# Altium PCB PCB.PcbDoc
Units mm, origin at the board's own origin, x right, y up, seen from the top; angles counter-clockwise.
Board outline 149.06 x 97.41 mm, 2 copper layers (Top Layer, Bottom Layer); 121 components, 100 nets, 410 pads, 67 vias.
Unrouted connection lines stored in the file: 3.
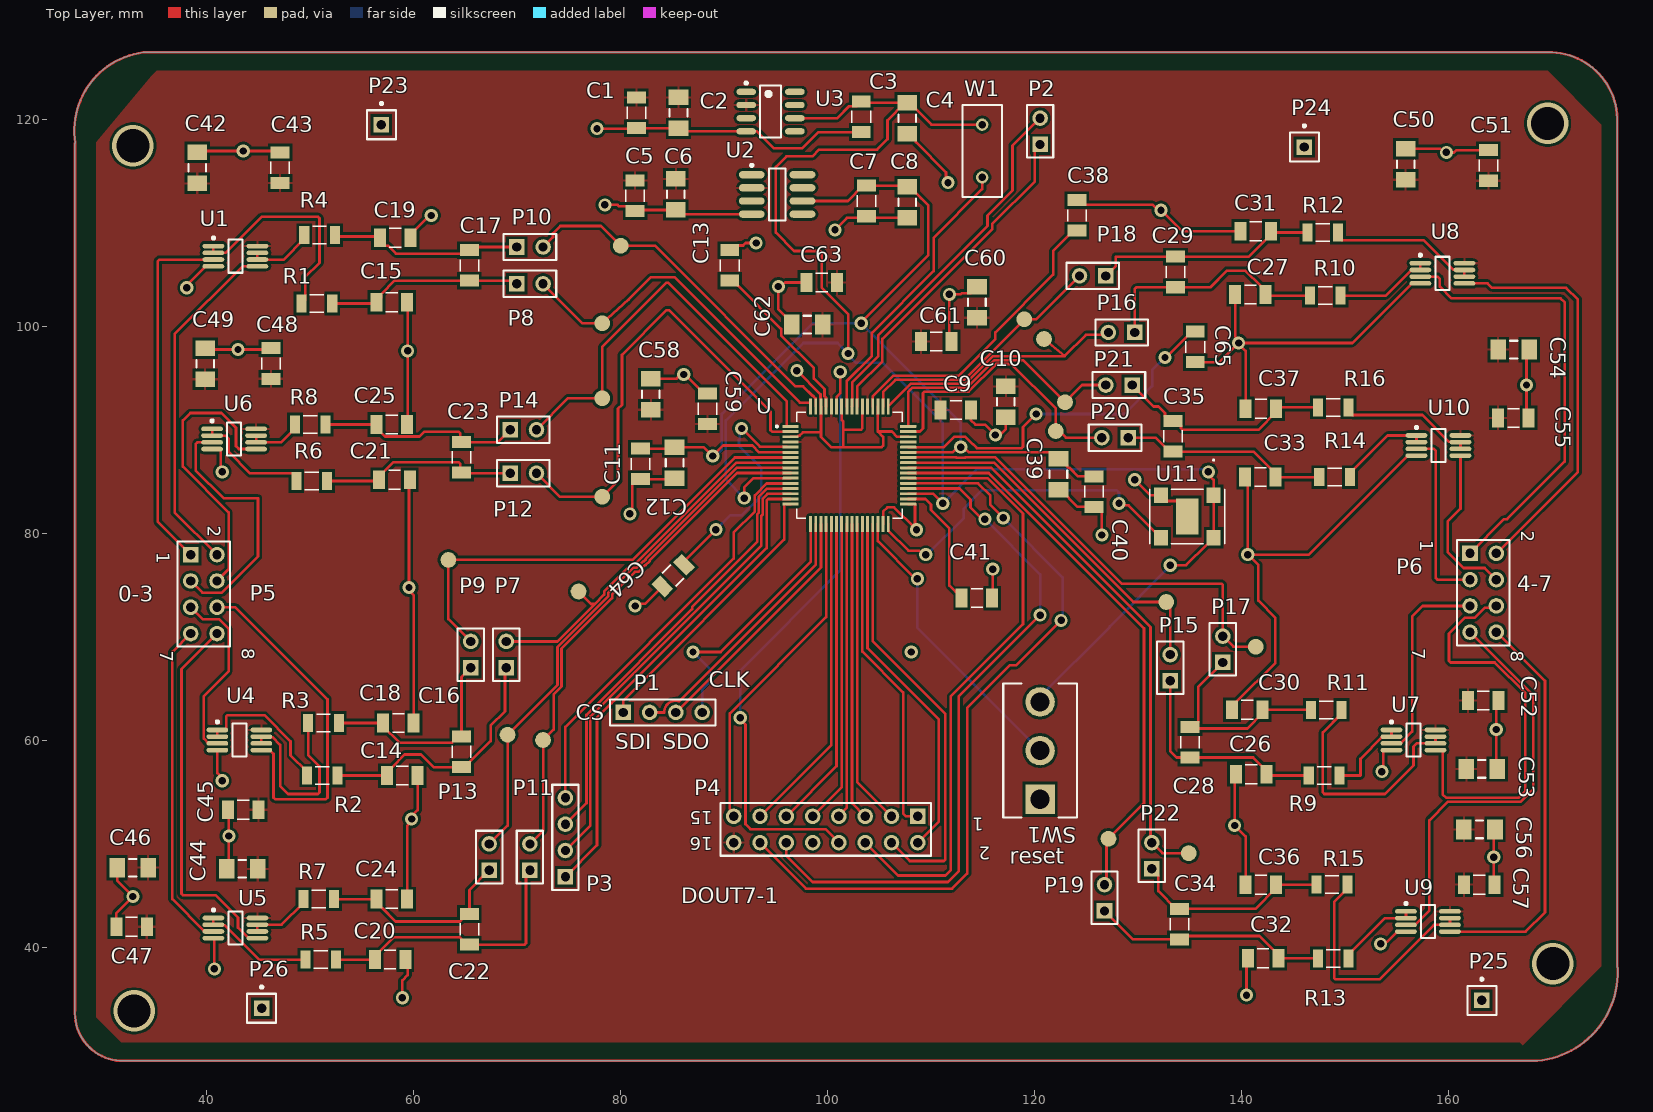
[diagram p0: Top Layer view]
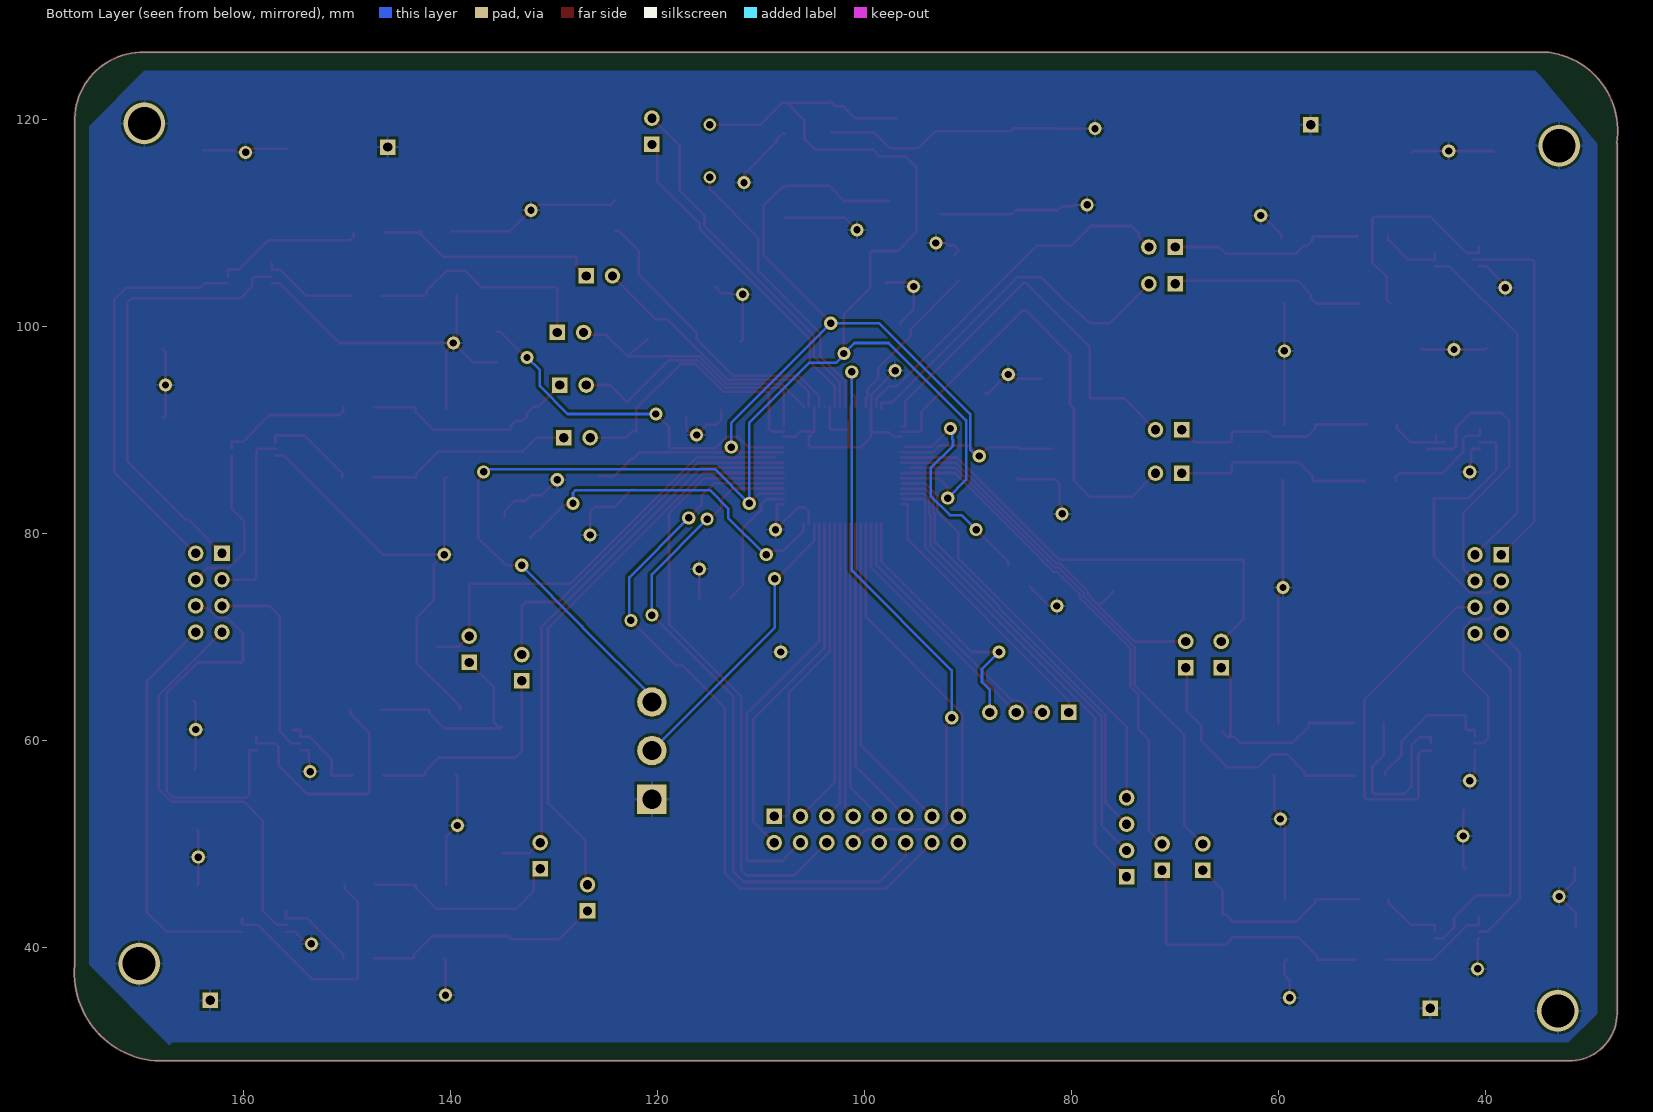
[diagram p1: Bottom Layer view, seen from below]
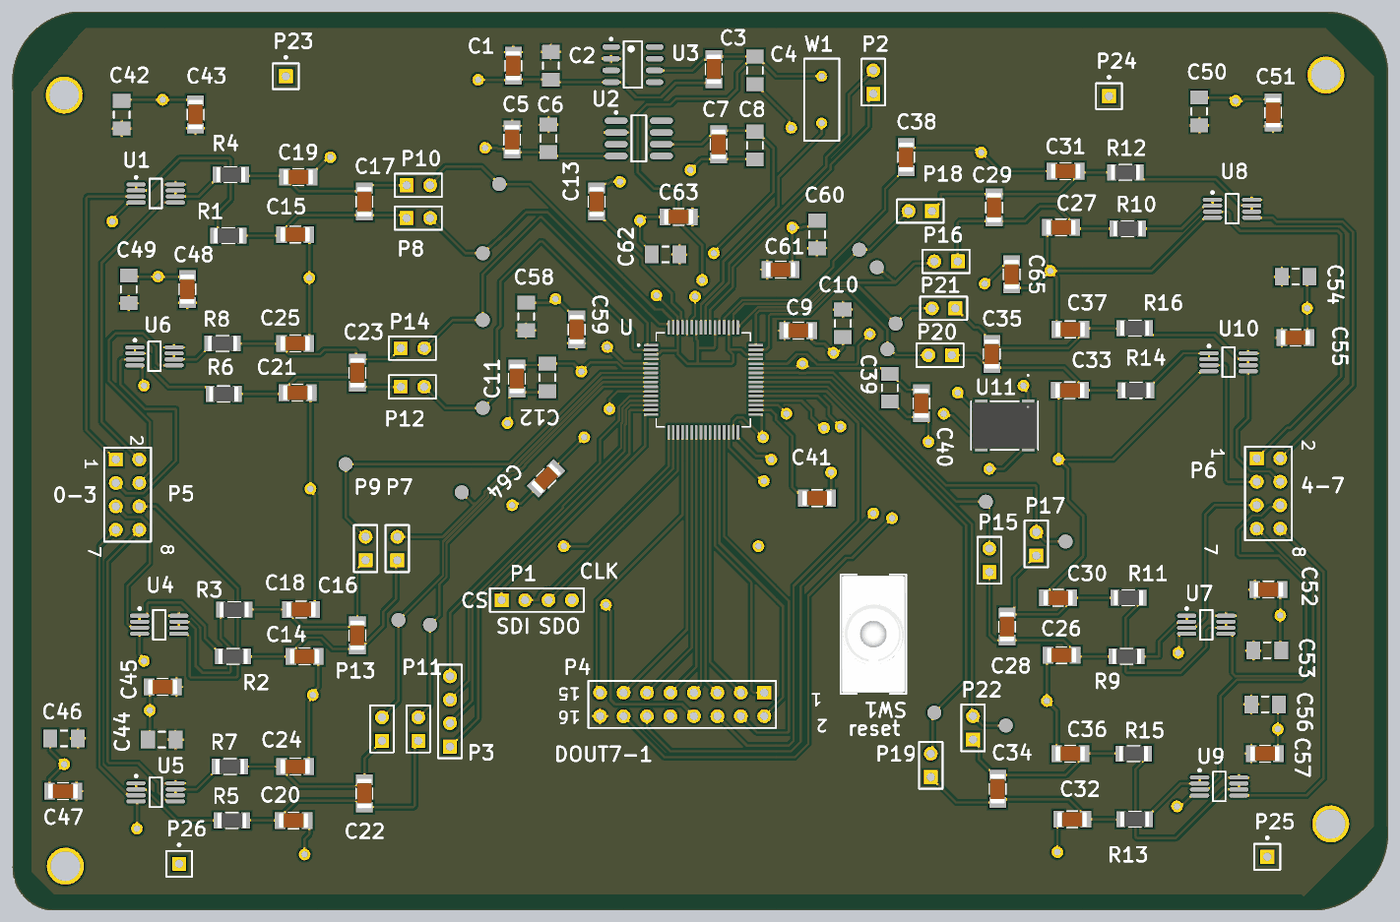
[diagram p2: 3D render of the assembled board from above, using the file's embedded part models]

## Layer stack, top to bottom
Top Solder: solder mask 0.0102, Solder Resist, Dk 3.5
Top Layer: signal copper 0.0356
Dielectric 1: dielectric 0.32, FR-4, Dk 4.8
Bottom Layer: signal copper 0.0356
Bottom Solder: solder mask 0.0102, Solder Resist, Dk 3.5

## Board outline
31.623,29.083 cw(c31.941,33.718) 27.305,34.036 27.305,117.729 27.34,117.735 cw(c34.861,118.935) 33.909,126.492 169.545,126.492 cw(c169.736,119.952) 176.276,120.142 176.276,38.354 cw(c167.767,37.592) 168.529,29.083

## Design rules (kind name [scope] priority, off if disabled: settings)
Clearance [All] p1: gap=0.254 ignorepadtopadclearanceinfootprint=TRUE except(0: Arc-Hole Track-Hole SMDPad-Hole THPad-Hole Via-Hole Fill-Hole Poly-Hole Region-Hole Text-Hole; 0.127: Arc-Arc Arc-Track Arc-SMDPad Track-Track Track-SMDPad SMDPad-SMDPad)
MinimumSolderMaskSliver [All] p1: minsoldermaskwidth=0.064
PolygonConnect [All] p1: connectstyle=Relief reliefconductorwidth=0.254 reliefentries=4 polygonreliefangle="90 Angle" airgapwidth=0.254
RoutingVias [All] p1: holewidth=0.711 width=1.27 viastyle="Through Hole" minholewidth=0.711 minwidth=1.27 maxholewidth=0.711 maxwidth=1.27
SilkToSolderMaskClearance [IsPad] p1: minsilkscreentomaskgap=0.127 clearancetoexposedcopper=TRUE
SolderMaskExpansion [All] p1: expansion=0.102 istentingtop=FALSE
Width [All] p1: maxlimit=0.254 minlimit=0.254 preferedwidth=0.254
28 further rules are at their usual default settings.

## Classes and differential pairs
component class Vref: C1 C2 C3 C4 C5 C6 C7 C8 U2 U3
component class driver4-8: C26 C27 C28 C29 C30 C31 C32 C33 C34 C35 C36 C37 C50 C51 C52 C53 C54 C55 C56 C57 P15 P16 P17 P18 P19 P20 P21 P22 R9 R10 R11 R12 R13 R14 R15 R16 U7 U8 U9 U10
component class driver0-3: C14 C15 C16 C17 C18 C19 C20 C21 C22 C23 C24 C25 C42 C43 C44 C45 C46 C47 C48 C49 P7 P8 P9 P10 P11 P12 P13 P14 R1 R2 R3 R4 R5 R6 R7 R8 U1 U4 U5 U6
component class ad7768: C9 C10 C11 C12 C13 C38 C39 C40 C41 C58 C59 C60 C61 C62 C63 C64 C65 P1 P2 P3 P4 P5 P6 P23 P24 P25 P26 SW1 U U11 W1

## Components (designator, comment, footprint, x,y, rotation, side; value= is the part's Value field where it differs from the comment)
C1 "1u" CAPC3216X127N 81.534,120.65 r90 top
C2 "12065C104KAT2A" CAPC3216X94X50ML20T25 85.598,120.65 r270 top
C3 "1u" CAPC3216X127N 103.251,120.269 r90 top
C4 "12065C104KAT2A" CAPC3216X94X50ML20T25 107.696,120.142 r270 top
C5 "1u" CAPC3216X127N 81.407,112.649 r90 top
C6 "12065C104KAT2A" CAPC3216X94X50ML20T25 85.344,112.776 r270 top
C7 "1u" CAPC3216X127N 103.759,112.141 r90 top
C8 "12065C104KAT2A" CAPC3216X94X50ML20T25 107.696,112.014 r270 top
C9 "1u" CAPC3216X127N 112.395,91.948 r180 top
C10 "12065C104KAT2A" CAPC3216X94X50ML20T25 117.221,92.734 r270 top
C11 "1u" CAPC3216X127N 81.915,86.741 r90 top
C12 "12065C104KAT2A" CAPC3216X94X50ML20T25 85.217,86.868 r270 top
C13 "1u" CAPC3216X127N 90.551,105.918 r90 top
C14 "120p" CAPC3216X94N 58.928,56.642 r180 top
C15 "120p" CAPC3216X94N 57.912,102.362 r180 top
C16 "330p" CAPC3216X94N 64.643,58.928 r270 top
C17 "330p" CAPC3216X94N 65.405,105.918 r270 top
C18 "120p" CAPC3216X94N 58.547,61.722 r0 top
C19 "120p" CAPC3216X94N 58.244,108.585 r0 top
C20 "120p" CAPC3216X94N 57.736,38.862 r180 top
C21 "120p" CAPC3216X94N 58.166,85.217 r180 top
C22 "330p" CAPC3216X94N 65.405,41.783 r270 top
C23 "330p" CAPC3216X94N 64.643,87.376 r270 top
C24 "120p" CAPC3216X94N 57.912,44.704 r0 top
C25 "120p" CAPC3216X94N 57.912,90.551 r0 top
C26 "120p" CAPC3216X94N 140.921,56.769 r0 top
C27 "120p" CAPC3216X94N 140.843,103.124 r0 top
C28 "330p" CAPC3216X94N 135.001,59.866 r270 top
C29 "330p" CAPC3216X94N 133.604,105.283 r270 top
C30 "120p" CAPC3216X94N 140.54,62.992 r180 top
C31 "120p" CAPC3216X94N 141.351,109.22 r180 top
C32 "120p" CAPC3216X94N 142.064,38.989 r0 top
C33 "120p" CAPC3216X94N 141.81,85.471 r0 top
C34 "330p" CAPC3216X94N 133.985,42.291 r270 top
C35 "330p" CAPC3216X94N 133.35,89.408 r270 top
C36 "120p" CAPC3216X94N 141.859,46.101 r180 top
C37 "120p" CAPC3216X94N 141.859,92.075 r180 top
C38 "1u" CAPC3216X127N 124.079,110.744 r90 top
C39 "1u" CAPC3216X127N 125.73,84.074 r90 top
C40 "12065C104KAT2A" CAPC3216X94X50ML20T25 122.301,85.749 r270 top
C41 "10uF" CAPC3216X178N 114.427,73.787 r0 top
C42 "0.1u" CAPC3216X94X50ML20T25 39.116,115.34 r90 top
C43 "1u" CAPC3216X127N 47.117,115.365 r90 top
C44 "0.1u" CAPC3216X94X50ML20T25 43.458,47.625 r180 top
C45 "1u" CAPC3216X127N 43.561,53.34 r180 top
C46 "0.1u" CAPC3216X94X50ML20T25 32.869,47.752 r180 top
C47 "1u" CAPC3216X127N 32.766,42.037 r180 top
C48 "1u" CAPC3216X127N 46.228,96.442 r90 top
C49 "0.1u" CAPC3216X94X50ML20T25 39.878,96.417 r90 top
C50 "0.1u" CAPC3216X94X50ML20T25 155.829,115.697 r90 top
C51 "1u" CAPC3216X127N 163.83,115.57 r90 top
C52 "1u" CAPC3216X127N 163.322,63.881 r0 top
C53 "0.1u" CAPC3216X94X50ML20T25 163.195,57.277 r0 top
C54 "0.1u" CAPC3216X94X50ML20T25 166.267,97.79 r0 top
C55 "1u" CAPC3216X127N 166.243,91.186 r0 top
C56 "0.1u" CAPC3216X94X50ML20T25 162.965,51.435 r0 top
C57 "1u" CAPC3216X127N 162.941,46.101 r0 top
C58 "12065C104KAT2A" CAPC3216X94X50ML20T25 82.931,93.472 r90 top
C59 "1u" CAPC3216X127N 88.392,92.075 r270 top
C60 "12065C104KAT2A" CAPC3216X94X50ML20T25 114.427,102.362 r90 top
C61 "1u" CAPC3216X127N 110.49,98.552 r180 top
C62 "12065C104KAT2A" CAPC3216X94X50ML20T25 98.02,100.203 r180 top
C63 "1u" CAPC3216X127N 99.441,104.267 r0 top
C64 "1u" CAPC3216X127N 85.09,75.946 r225 top
C65 "1u" CAPC3216X127N 135.509,98.044 r270 top
P1 "Header 4" HDR1X4 80.264,62.738 r0 top
P2 "Header 2" HDR1X2 120.523,117.602 r90 top
P3 "Header 4" HDR1X4 74.676,46.863 r90 top
P4 "Header 8X2" HDR2X8 108.712,52.705 r180 top
P5 "Header 4X2" HDR2X4 38.481,77.978 r270 top
P6 "Header 4X2" HDR2X4 162.052,78.105 r270 top
P7 "Header 2" HDR1X2 68.961,67.056 r90 top
P8 "Header 2" HDR1X2 69.977,104.14 r0 top
P9 "Header 2" HDR1X2 65.532,67.056 r90 top
P10 "Header 2" HDR1X2 69.977,107.696 r0 top
P11 "Header 2" HDR1X2 71.247,47.498 r90 top
P12 "Header 2" HDR1X2 69.342,85.852 r0 top
P13 "Header 2" HDR1X2 67.31,47.498 r90 top
P14 "Header 2" HDR1X2 69.342,90.043 r0 top
P15 "Header 2" HDR1X2 133.096,65.786 r90 top
P16 "Header 2" HDR1X2 129.667,99.441 r180 top
P17 "Header 2" HDR1X2 138.176,67.564 r90 top
P18 "Header 2" HDR1X2 126.873,104.902 r180 top
P19 "Header 2" HDR1X2 126.746,43.561 r90 top
P20 "Header 2" HDR1X2 129.032,89.281 r180 top
P21 "Header 2" HDR1X2 129.413,94.361 r180 top
P22 "Header 2" HDR1X2 131.318,47.625 r90 top
P23 "Plug" PIN1 56.896,119.507 r0 top
P24 "Plug" PIN1 146.05,117.348 r0 top
P25 "Plug" PIN1 163.195,34.925 r0 top
P26 "Plug" PIN1 45.339,34.163 r0 top
R1 "33" RESC3116X75N 50.673,102.235 r0 top
R2 "33" RESC3116X75N 51.181,56.642 r0 top
R3 "33" RESC3116X75N 51.308,61.722 r0 top
R4 "33" RESC3116X75N 50.927,108.839 r0 top
R5 "33" RESC3116X75N 51.054,38.862 r0 top
R6 "33" RESC3116X75N 50.165,85.09 r0 top
R7 "33" RESC3116X75N 50.844,44.704 r0 top
R8 "33" RESC3116X75N 50.038,90.551 r0 top
R9 "33" RESC3116X75N 147.955,56.642 r180 top
R10 "33" RESC3116X75N 148.082,102.997 r180 top
R11 "33" RESC3116X75N 148.165,62.992 r180 top
R12 "33" RESC3116X75N 147.828,109.093 r180 top
R13 "33" RESC3116X75N 148.844,38.989 r180 top
R14 "33" RESC3116X75N 148.971,85.471 r180 top
R15 "33" RESC3116X75N 148.717,46.101 r180 top
R16 "33" RESC3116X75N 148.844,92.202 r180 top
SW1 "A101SYCB04" FP-A101SYCB04-MFG 120.523,59.055 r180 top
U "AD7768-4BSTZ" QFP50P1200X1200X160-64N 102.108,86.614 r0 top
U1 "ADA4841-2YRMZ-RL" ADI-RM-8_M 42.799,106.807 r0 top
U2 "ADR4540BRZ" ADI-R-8_M 95.123,112.776 r0 top
U3 "ADR4533BRZ" ADI-R-8_L 94.488,120.777 r0 top
U4 "ADA4841-2YRMZ-RL" ADI-RM-8_M 43.18,60.071 r0 top
U5 "ADA4841-2YRMZ-RL" ADI-RM-8_M 42.799,41.91 r0 top
U6 "ADA4841-2YRMZ-RL" ADI-RM-8_M 42.672,89.154 r0 top
U7 "ADA4841-2YRMZ-RL" ADI-RM-8_M 156.591,60.071 r0 top
U8 "ADA4841-2YRMZ-RL" ADI-RM-8_M 159.385,105.156 r0 top
U9 "ADA4841-2YRMZ-RL" ADI-RM-8_M 157.988,42.545 r0 top
U10 "ADA4841-2YRMZ-RL" ADI-RM-8_M 159.004,88.519 r0 top
U11 "DSC1001AI2-032.7680" DFN4_7X5_MCH 134.747,81.661 r270 top
W1 "J_SPI" RAD-0.2 114.935,116.967 r270 top

## Footprints (in the part's own frame and the unit in brackets; to place one, negate y for a bottom-side part, rotate by r counter-clockwise, add the part's x,y. Pads: shape width x height; smd on the part's side, far side on the other; paste and mask are expansions set on the pad)
ADI-R-8_L [mm] "SOIC, 8-Leads, Body 4.9x3.9mm, Pitch 1.27mm, IPC High Density"
  oval 1.9x0.6 smd: 1(-2.35,1.905) 2(-2.35,0.635) 3(-2.35,-0.635) 4(-2.35,-1.905) 5(2.35,-1.905) 6(2.35,-0.635) 7(2.35,0.635) 8(2.35,1.905)
  silkscreen extent -2.47,-2.5 1,2.88, body extent -2,-2.5 2,2.5, height 1.75
ADI-R-8_M [mm] "SOIC, 8-Leads, Body 4.9x3.9mm, Pitch 1.27mm, IPC Low Density"
  oval 2.5x0.7 smd: 1(-2.45,1.905) 2(-2.45,0.635) 3(-2.45,-0.635) 4(-2.45,-1.905) 5(2.45,-1.905) 6(2.45,-0.635) 7(2.45,0.635) 8(2.45,1.905)
  silkscreen extent -2.57,-2.5 0.8,2.93, body extent -2,-2.5 2,2.5, height 1.75
ADI-RM-8_M [mm] "SOP, 8-Leads, Body 3x3mm, Pitch 0.65mm, IPC Low Density"
  oval 2.1x0.45 smd: 1(-2.125,0.975) 2(-2.125,0.325) 3(-2.125,-0.325) 4(-2.125,-0.975) 5(2.125,-0.975) 6(2.125,-0.325) 7(2.125,0.325) 8(2.125,0.975)
  silkscreen extent -2.25,-1.6 0.67,1.87, body extent -1.6,-1.6 1.6,1.6, height 1.1
CAPC3216X94N [mm]
  rect 1.16x1.82 smd: 1(-1.475,0) 2(1.475,0)
  silkscreen extent -0.57,-0.9 0.57,0.9, body extent -1.6,-0.8 1.6,0.8, height 0.94
CAPC3216X94X50ML20T25 [mm] "Chip Capacitor, 2-Leads, Body 3.20x1.60mm, IPC Low Density"
  rect 1.5x1.9 smd: 1(-1.5,0) 2(1.5,0)
  silkscreen extent -0.35,-0.85 0.35,0.85, body extent -1.7,-0.9 1.7,0.9, height 0.94
CAPC3216X127N [mm]
  rect 1.16x1.82 smd: 1(-1.475,0) 2(1.475,0)
  silkscreen extent -0.57,-0.9 0.57,0.9, body extent -1.6,-0.8 1.6,0.8, height 1.27
CAPC3216X178N [mm]
  rect 1.16x1.82 smd: 1(-1.475,0) 2(1.475,0)
  silkscreen extent -0.57,-0.9 0.57,0.9, body extent -1.6,-0.8 1.6,0.8, height 1.78
DFN4_7X5_MCH [mm]
  rect 1.505x1.349 smd paste+0 mask+0: 1(-2.052,2.54) 2(-2.052,-2.54) 3(2.052,-2.54) 4(2.052,2.54)
  rect 3.5x2.2 smd paste+0 mask+0: 5(0,0)
  silkscreen extent -5.52,-3.63 2.63,3.63, body extent -2.5,-3.5 2.5,3.5, height 0.85
FP-A101SYCB04-MFG [mil]
  rect 112.37x112.37 hole 73 paste-39370.1 mask+0: 1(0,185)
  round 112.37 hole 73 paste-39370.1 mask+0: 2(0,0) 3(0,-185)
  silkscreen extent -140,-255 140,255, body extent -144,-259 144,259, height 10
HDR1X2 [mm] "Connector; Header; 2 Position"
  rect 1.5x1.5 hole 0.9: 1(0,0)
  round 1.5 hole 0.9: 2(2.54,0)
  silkscreen extent -1.27,-1.27 3.81,1.27
HDR1X4 [mm] "Connector; Header; 4 Position"
  rect 1.5x1.5 hole 0.9: 1(0,0)
  round 1.5 hole 0.9: 2(2.54,0) 3(5.08,0) 4(7.62,0)
  silkscreen extent -1.27,-1.27 8.89,1.27
HDR2X4 [mm] "Connector; Header; 4x2 Position"
  rect 1.5x1.5 hole 0.9: 1(0,0)
  round 1.5 hole 0.9: 2(0,2.54) 3(2.54,0) 4(2.54,2.54) 5(5.08,0) 6(5.08,2.54) 7(7.62,0) 8(7.62,2.54)
  silkscreen extent -1.27,-1.27 8.89,3.81
HDR2X8 [mm] "Connector; Header; 8x2 Position"
  rect 1.5x1.5 hole 0.9: 1(0,0)
  round 1.5 hole 0.9: 2(0,2.54) 3(2.54,0) 4(2.54,2.54) 5(5.08,0) 6(5.08,2.54) 7(7.62,0) 8(7.62,2.54) 9(10.16,0) 10(10.16,2.54) 11(12.7,0) 12(12.7,2.54) 13(15.24,0) 14(15.24,2.54) 15(17.78,0) 16(17.78,2.54)
  silkscreen extent -1.27,-1.27 19.05,3.81
PIN1 [mm] "Connector; Plug"
  rect 1.5x1.5 hole 0.9: 1(0,0)
  silkscreen extent -1.4,-1.4 1.4,2.17
QFP50P1200X1200X160-64N [mm]
  rrect25% 1.56x0.28 smd mask+0.051: 1(-5.68,3.75) 2(-5.68,3.25) 3(-5.68,2.75) 4(-5.68,2.25) 5(-5.68,1.75) 6(-5.68,1.25) 7(-5.68,0.75) 8(-5.68,0.25) 9(-5.68,-0.25) 10(-5.68,-0.75) 11(-5.68,-1.25) 12(-5.68,-1.75) 13(-5.68,-2.25) 14(-5.68,-2.75) 15(-5.68,-3.25) 16(-5.68,-3.75) 33(5.68,-3.75) 34(5.68,-3.25) 35(5.68,-2.75) 36(5.68,-2.25) 37(5.68,-1.75) 38(5.68,-1.25) 39(5.68,-0.75) 40(5.68,-0.25) 41(5.68,0.25) 42(5.68,0.75) 43(5.68,1.25) 44(5.68,1.75) 45(5.68,2.25) 46(5.68,2.75) 47(5.68,3.25) 48(5.68,3.75)
  rrect25% 0.28x1.56 smd mask+0.051: 17(-3.75,-5.68) 18(-3.25,-5.68) 19(-2.75,-5.68) 20(-2.25,-5.68) 21(-1.75,-5.68) 22(-1.25,-5.68) 23(-0.75,-5.68) 24(-0.25,-5.68) 25(0.25,-5.68) 26(0.75,-5.68) 27(1.25,-5.68) 28(1.75,-5.68) 29(2.25,-5.68) 30(2.75,-5.68) 31(3.25,-5.68) 32(3.75,-5.68) 49(3.75,5.68) 50(3.25,5.68) 51(2.75,5.68) 52(2.25,5.68) 53(1.75,5.68) 54(1.25,5.68) 55(0.75,5.68) 56(0.25,5.68) 57(-0.25,5.68) 58(-0.75,5.68) 59(-1.25,5.68) 60(-1.75,5.68) 61(-2.25,5.68) 62(-2.75,5.68) 63(-3.25,5.68) 64(-3.75,5.68)
  silkscreen extent -7.11,-5.1 5.1,5.1
RAD-0.2 [mm] "Radial Cap, Thru-Hole; 2 Leads; 0.2 in Pin Spacing"
  round 1.2 hole 0.7: 1(-2.54,0) 2(2.54,0)
  silkscreen extent -4.44,-1.91 4.44,1.91
RESC3116X75N [mm]
  rect 0.97x1.73 smd: 1(-1.48,0) 2(1.48,0)
  silkscreen extent -0.67,-0.85 0.67,0.85, body extent -1.55,-0.8 1.55,0.8, height 0.75

## Part data
C1 C3 C5 C7 C9 C11 C13 C38 C39 C43 C45 C47 C48 C51 C52 C55 C57 C59 C61 C63 C64 C65: library part 1206YC105KAT2A, "Cap Ceramic 1uF 16V X7R 10% SMD 1206 125ÂÂŽ T/R", Package=None, Availability=Unavailable, MF="{'manufacturer': u'AVX'}", MP=1206YC105KAT2A, Price=None
C2 C4 C6 C8 C10 C12 C40 C42 C44 C46 C49 C50 C53 C54 C56 C58 C60 C62: library part CMP-2000-05018-1, "Chip Capacitor, Ceramic, 100 nF, 10%, 50 V, 1206, RoHS, Tape and Reel", Capacitance=100nF, Case Size/Dimension=1206, Dielectric=X7R, Manufacturer=AVX, Rated Voltage=50V, Tolerance (%)=±10%, Datasheet URL=http://www.mouser.com/ds/2/40/cauto-360.pdf, Datasheet Version=Sep-14, Manufacturer URL=http://www.avx.com/
C14 C15 C18 C19 C20 C21 C24 C25 C26 C27 C30 C31 C32 C33 C36 C37: library part 12061A121JAT2A, "CERAMIC CAPACITOR 120PF 100V, C0G, 5%, 1206", Package=None, Availability=Unavailable, MF="{'manufacturer': u'AVX'}", MP=12061A121JAT2A, Price=None
C16 C17 C22 C23 C28 C29 C34 C35: library part 12065A331JAT2A, "Ceramic Multilayer Capacitor; Capacitor Type:General Purpose; Capacitance:330pF; Capacitance Tolerance:Â± 5%; Voltage Rating:50VDC; Capacitor Dielectric Type:Multilayer Ceramic; Package/Case:1206; Termination Type:SMD ;RoHS Compliant: Yes", Package=None, Availability=Unavailable, MF="{'manufacturer': u'AVX'}", MP=12065A331JAT2A, Price=None
C41: library part 1206ZC106KAT2A, "CAPACITOR, MLCC, X7R, 10UF, 10V, 1206", Package=None, Availability=Unavailable, MF="{'manufacturer': u'AVX'}", MP=1206ZC106KAT2A, Price=None
P1 P3: "Header, 4-Pin", LatestRevisionDate=17-Jul-2002, LatestRevisionNote="Re-released for DXP Platform.", Publisher="Altium Limited"
P2 P7 P8 P9 P10 P11 P12 P13 P14 P15 P16 P17 P18 P19 P20 P21 P22: "Header, 2-Pin", LatestRevisionDate=17-Jul-2002, LatestRevisionNote="Re-released for DXP Platform.", Publisher="Altium Limited"
P4: "Header, 8-Pin, Dual row", LatestRevisionDate=17-Jul-2002, LatestRevisionNote="Re-released for DXP Platform.", Publisher="Altium Limited"
P5 P6: "Header, 4-Pin, Dual row", LatestRevisionDate=17-Jul-2002, LatestRevisionNote="Re-released for DXP Platform.", Publisher="Altium Limited"
R1 R2 R3 R4 R5 R6 R7 R8 R9 R10 R11 R12 R13 R14 R15 R16: library part RTAN1206BKE33R0, Package=None, Availability=Unavailable, MF="{'manufacturer': u'Stackpole Electronics Inc'}", MP=RTAN1206BKE33R0, Price=None
SW1: library part CMP-03408-000017-1, "SWITCH TOGGLE SPDT 0.4VA 20V", Actuator Color=Chrome, Contact Current Rating=400mA, Contact Resistance=10mR, Flammability Rating="UL94 V-1", Insulation Resistance=30MR, Max Operating Temperature=85°C, Max Voltage Rating (AC)=20V, Min Operating Temperature=-30°C, Package Quantity=100, Power Rating=400mW, Actuator Length=10.41mm, Actuator Material=Phenolic, Actuator Type="Standard Round", Contact Material=Copper, Contact Plating=Gold, Depth=6.86mm, Electrical Life=6000Cycles, ELV=Compliant, Illumination Type=Non-Illuminated, Lead Free="Lead Free", Max Voltage Rating (DC)=20V, Mount=Panel, Number of Poles=1, Number of Positions=2, Orientation=Straight, Packaging=Bulk, Radiation Hardening=No, REACH SVHC="No SVHC", RoHS Compliant=Yes, Series="Gemini A", Switch Function=On-On, Termination="PC Pins", Throw Configuration=SPDT, Voltage Rating (AC)=20V, Voltage Rating (DC)=20V
U: "24 Bit Analog to Digital Converter 4 Input 4 Sigma-Delta 64-LQFP _10x10_", Package="LQFP -64 Analog Devices", Digi-Key_Part_Number=AD7768-4BSTZ-ND, Digi-Key_Purchase_URL=https://www.digikey.com/product-detail/en/analog-devices-inc/AD7768-4BSTZ/AD7768-4BSTZ-ND/6072260?utm_source=snapeda&utm_medium=aggregator&utm_campaign=symbol, MF="Analog Devices", MP=AD7768-4BSTZ, SnapEDA_Link=https://www.snapeda.com/parts/AD7768-4BSTZ/Analog%20Devices%20Inc./view-part/501603/?ref=snap
U1 U4 U5 U6 U7 U8 U9 U10: library part CMP-0384-01677-1, "Double Channel Low Wide Band Noise Operational Amplifier, 80 MHz BW, 13 V/us SR, Industrial, 8-pin SOP (RM-8), Reel", Amplifiers Per Package=2, Generic Part Number=ADA4841-2, Input Bias Current=3uA, Input Offset Voltage=40uV, Manufacturer="Analog Devices", Code_JEDEC=MO-187-AA, ComponentLink1Description="Manufacturer URL", ComponentLink1URL=http://www.analog.com/en/index.html, ComponentLink2Description=Datasheet, ComponentLink2URL=http://www.analog.com/static/imported-files/data_sheets/ADA4841-1_4841-2.pdf, ComponentLink3Description="Package Specification", ComponentLink3URL=http://www.analog.com/static/imported-files/packages/PKG_PDF/MSOP%28RM%29/RM_8.pdf, DatasheetVersion="Rev. E", Iq/Amp=1.5mA, Mounting Technology="Surface Mount", PackageDescription="8-Pin Mini Small Outline Package, Body 3 x 3 mm, Pitch 0.65 mm", PackageReference=RM-8, PartNumber=ADA4841-2YRMZ-RL, Slew Rate=13V/us, Small Signal Bandwidth=80MHz, V Span Max=12V, V Span Min=2.7V
U2: library part CMP-0784-00192-1, "Ultralow Noise, High Accuracy Voltage Reference, 4.096 V Output, 3 to 15 V Supply, Industrial, 8-pin SOIC (R-8), Tube", Manufacturer="Analog Devices", Operating Temp Range="-40 to 125 degC", Code_JEDEC=MS-012-AA, ComponentLink1Description="Manufacturer URL", ComponentLink1URL=http://www.analog.com/en/index.html, ComponentLink2Description=Datasheet, ComponentLink2URL=http://www.analog.com/static/imported-files/data_sheets/ADR4520_4525_4530_4533_4540_4550.pdf, ComponentLink3Description="Package Specification", ComponentLink3URL=http://www.analog.com/static/imported-files/packages/PKG_PDF/SOIC_Narrow%20(R)/R_8.pdf, ComponentLink4Description="URL Link1", ComponentLink4URL="Product URL:http://www.analog.com/en/special-linear-functions/voltage-references/adr4540/products/product.html", DatasheetVersion="Rev. 0", Max V Supply (V)=15, Min V Supply (V)=3, Mounting Technology="Surface Mount", PackageDescription="8-Pin Standard Small Outline Package, Body 4.9 x 3.9 mm, Pitch 1.27 mm", PackageReference=R-8, PackageVersion="060506-A, 06/2006", Packing=Tube, PartNumber=ADR4540BRZ, Ref Out TC (ppm/C)=2, Vout=4.096V
U3: library part CMP-0784-00188-1, "Ultralow Noise, High Accuracy Voltage Reference, 3.3 V Output, 3 to 15 V Supply, Industrial, 8-pin SOIC (R-8), Tube", Manufacturer="Analog Devices", Operating Temp Range="-40 to 125 degC", Code_JEDEC=MS-012-AA, ComponentLink1Description="Manufacturer URL", ComponentLink1URL=http://www.analog.com/en/index.html, ComponentLink2Description=Datasheet, ComponentLink2URL=http://www.analog.com/static/imported-files/data_sheets/ADR4520_4525_4530_4533_4540_4550.pdf, ComponentLink3Description="Package Specification", ComponentLink3URL=http://www.analog.com/static/imported-files/packages/PKG_PDF/SOIC_Narrow%20(R)/R_8.pdf, ComponentLink4Description="URL Link1", ComponentLink4URL="Product URL:http://www.analog.com/en/special-linear-functions/voltage-references/adr4533/products/product.html", DatasheetVersion="Rev. 0", Max V Supply (V)=15, Min V Supply (V)=3, Mounting Technology="Surface Mount", PackageDescription="8-Pin Standard Small Outline Package, Body 4.9 x 3.9 mm, Pitch 1.27 mm", PackageReference=R-8, PackageVersion="060506-A, 06/2006", Packing=Tube, PartNumber=ADR4533BRZ, Ref Out TC (ppm/C)=2, Vout=3.3V
U11: "No Description Available", Mfr_Name=Microchip, Copyright="Copyright (C) 2021 Ultra Librarian. All rights reserved.", Digi-Key_Part_Number_1=DSC1001AI2-032.7680-ND, Manufacturer_Part_Number=DSC1001AI2-032.7680, RefDes=RefDes, Type=DEV
W1: library part Jumper, "Jumper Wire", LatestRevisionDate=17-Jul-2002, LatestRevisionNote="Re-released for DXP Platform.", PackageDescription="Radial Cap, Thru-Hole; 2 Leads; 0.2 in Pin Spacing", PackageReference=RAD-0.2, Published=24-Mar-1999, Publisher="Altium Limited"
P23 P24 P25 P26: LatestRevisionDate=17-Jul-2002, LatestRevisionNote="Re-released for DXP Platform.", Publisher="Altium Limited"

## Free pads (board coordinates)
  round 1.524 smd: 4(80.01,107.823) 5(78.232,100.33) 6(78.232,93.091) 7(78.232,83.566) 8(63.373,77.47) 10(75.946,74.422) 11(69.088,60.579) 12(72.517,60.071) 13(118.999,100.711) 14(120.904,98.806) 15(122.936,92.71) 16(122.047,89.916) 17(141.351,69.088) 18(132.715,73.406) 19(134.874,49.149) 20(127.127,50.546)

## Via types
v1: diameter 1.27, hole 0.711, Top Layer to Bottom Layer, 63 vias
v2: diameter 4, hole 3.2, Top Layer to Bottom Layer, 4 vias

## Nets (pads, with @x,y where several pads share a name; then routed paths per layer and width w, separated by ;. In a path a pad name is that pad's centre, name@x,y a point inside that pad or via, vN(x,y) a via of type N, cw(c..) or ccw(c..) an arc to the next point about the centre after c; other vN are vias at no path point)
5V: C1.2 C2.1 C5.2 C6.1 C9.2 C10.1 C42.1 C43.1 C44.1 C45.1 C46.1 C47.1 C48.1 C49.1 C50.1 C51.1 C52.1 C53.1 C54.1 C55.1 C56.1 C57.1 C58.1 C59.2 C60.1 C61.2 C62.1 C63.2 P4.16 U1.8 U2.2 U3.2 U4.8 U5.8 U6.8 U7.8 U8.8 U9.8 U10.8 U.4 U.45 U.53 U.60 | length 0
  Top Layer w0.254: U.53 U.53@103.871,92.307
AIN0+: P8.2 pad.5 U.64 | length 34.7
  Top Layer w0.254: P8.2 76.327,100.33 pad.5 80.769,102.616 82.928,104.775 85.217,104.775 97.326,92.666 98.345,92.666 98.358,92.653 U.64@98.358,92.15
AIN0-: P10.2 pad.4 U.63 | length 35
  Top Layer w0.254: P10.2 73.473,108.652 73.473,109.011 74.19,109.728 78.105,109.728 pad.4 83.329,107.823 96.918,94.234 97.632,94.234 98.538,93.328 98.583,93.328 98.845,93.066 U.63@98.845,92.307
AIN1+: P12.2 pad.7 U.2 | length 45.8
  Top Layer w0.254: P12.2 74.168,83.566 pad.7 79.756,85.09 79.756,92.075 80.137,92.456 80.137,97.282 84.455,101.6 84.692,101.6 94.488,91.804 94.488,90.013 94.637,89.864 U.2
AIN1-: P14.2 pad.6 U.1 | length 40.5
  Top Layer w0.254: P14.2 74.93,93.091 pad.6 78.232,98.044 84.413,104.225 84.624,104.225 96.056,92.793 96.056,90.377 96.069,90.364 U.1
AIN2+: P7.2 pad.10 U.8 | length 36.9
  Top Layer w0.254: P7.2 73.909,69.596 77.531,73.218 ; pad.10 77.15,73.218 77.531,73.218 ; U.8 91.177,86.864 81.402,77.089 81.069,77.089 78.423,74.442 78.423,74.109 77.531,73.218
AIN2-: P9.2 pad.8 U.7 | length 45.9
  Top Layer w0.254: P9.2 63.373,71.755 pad.8 81.153,77.47 91.047,87.364 U.7
AIN3+: P11.2 pad.12 U.10 | length 49.5
  Top Layer w0.254: P11.2 72.517,51.308 pad.12 73.533,61.087 73.533,64.485 74.295,65.247 74.295,68.904 79.185,73.794 79.185,74.127 81.385,76.327 81.718,76.327 82.352,76.961 82.432,76.961 82.804,77.333 82.804,77.413 91.255,85.864 U.10
AIN3-: P13.2 pad.11 U.9 | length 50.9
  Top Layer w0.254: P13.2 69.088,51.816 pad.11 73.914,65.405 73.914,69.062 78.804,73.952 78.804,74.285 81.227,76.708 81.56,76.708 82.194,77.342 82.274,77.342 82.423,77.491 82.423,77.571 91.212,86.36 95.631,86.36
AIN4+: P16.2 pad.14 U.49 | length 26.7
  Top Layer w0.254: U.49 108.052,94.488 113.315,94.488 115.982,97.155 122.809,97.155 ; pad.14 122.901,97.155 124.951,99.204 126.89,99.204 P16.2
AIN4-: P18.2 pad.13 U.50 | length 25
  Top Layer w0.254: U.50 105.371,92.307 105.371,93.687 106.553,94.869 113.157,94.869 pad.13 120.142,100.711 P18.2
AIN5+: P20.2 pad.16 U.47 | length 27.6
  Top Layer w0.254: U.47 107.801,89.877 108.927,89.877 109.22,90.17 109.22,93.577 109.369,93.726 113.63,93.726 116.297,96.393 117.729,96.393 122.047,92.075 pad.16 122.391,89.916 123.026,89.281 P20.2
AIN5-: P21.2 pad.15 U.48 | length 26.1
  Top Layer w0.254: U.48 107.788,93.685 108.21,94.107 113.473,94.107 116.14,96.774 118.872,96.774 pad.15 124.587,94.361 P21.2
AIN6+: P15.2 pad.18 U.41 | length 35.7
  Top Layer w0.254: U.41 116.082,86.864 129.54,73.406 pad.18 133.096,73.025 P15.2
AIN6-: P17.2 pad.17 U.42 | length 43.3
  Top Layer w0.254: 108.585,87.376 112.414,87.376 112.439,87.351 113.28,87.351 113.305,87.376 116.205,87.376 128.397,75.184 138.027,75.184 138.176,75.035 P17.2 139.192,69.088 pad.17
AIN7+: P19.2 pad.20 U.39 | length 55.3
  Top Layer w0.254: U.39 115.558,85.864 130.556,70.866 130.556,53.975 pad.20 126.936,50.355 126.936,46.291 P19.2
AIN7-: P22.2 pad.19 U.40 | length 54.6
  Top Layer w0.254: U.40 115.82,86.364 131.191,70.993 131.191,50.292 P22.2 132.334,49.149 pad.19
DCLK: P4.2 U.28 | length 34.5
  Top Layer w0.254: U.28 103.858,68.95 110.744,62.064 110.744,52.197 P4.2
DOUT0: P4.1 U.27 | length 31.1
  Top Layer w0.254: U.27 103.358,68.604 107.303,64.66 107.303,52.983 107.581,52.705 P4.1
DOUT1: P4.3 U.26 | length 29.6
  Top Layer w0.254: U.26 102.858,56.019 P4.3
DOUT2: P4.5 U.25 | length 28.8
  Top Layer w0.254: U.25 102.358,53.979 P4.5
DOUT3: P4.7 U.24 | length 28.5
  Top Layer w0.254: P4.7 101.092,52.772 101.858,53.538 U.24
DOUT4: P4.9 U.23 | length 29.4
  Top Layer w0.254: P4.9 101.358,55.511 U.23
DOUT5: P4.11 U.22 | length 30.2
  Top Layer w0.254: P4.11 100.858,57.551 U.22
DOUT6: P4.13 U.21 | length 31.1
  Top Layer w0.254: P4.13 100.358,59.591 U.21
DOUT7: P4.15 U.20 | length 32.2
  Top Layer w0.254: P4.15 90.932,53.042 90.551,53.423 90.551,62.651 99.858,71.958 U.20
DRDY: P4.4 U.29 | length 41.3
  Top Layer w0.254: U.29 104.358,69.632 111.379,62.611 111.379,48.536 111.23,48.387 107.95,48.387 P4.4
GND: C1.1 C2.2 C3.1 C4.2 C5.1 C6.2 C7.1 C8.2 C9.1 C10.2 C11.1 C12.2 C13.2 C14.1 C15.1 C18.2 C19.2 C20.1 C21.1 C24.2 C25.2 C26.1 C27.1 C30.2 C31.2 C32.1 C33.1 C36.2 C37.2 C38.2 C39.1 C40.2 C41.2 C42.2 C43.2 C44.2 C45.2 C46.2 C47.2 C48.2 C49.2 C50.2 C51.2 C52.2 C53.2 C54.2 C55.2 C56.2 C57.2 C58.2 C59.1 C60.2 C61.1 C62.2 C63.1 C64.2 C65.2 P23.1 P24.1 P25.1 P26.1 SW1.1 U1.4 U2.4 U3.4 U4.4 U5.4 U6.4 U7.4 U8.4 U9.4 U10.4 U11.2 U11.5 U.3 U.31 U.33 U.46 U.51 U.54 U.58 U.62 | length 396.7
  Top Layer w0.254: C47.2 31.291,43.356 v1(32.893,44.958) 31.369,46.482 C46.2 ; v1(38.1,103.759) 38.1,104.03 39.902,105.832 U1.4 ; C42.2 39.243,116.967 v1(43.561,116.967) 46.99,116.967 C43.2 ; C49.2 40.005,97.79 v1(43.053,97.79) 46.101,97.79 C48.2 ; U6.4 41.296,88.179 41.387,88.088 41.387,86.121 v1(41.529,85.979) ; U5.4 40.676,40.935 40.767,40.844 v1(40.767,37.973) ; U4.4 41.055,56.883 41.529,56.409 v1(41.529,56.134) ; C44.2 42.164,47.831 v1(42.164,50.8) 42.164,53.262 C45.2 C45.2@42.037,53.291 ; v1(58.928,35.179) 58.928,36.852 59.436,37.36 59.436,38.637 C20.1 ; C24.2 59.387,51.746 59.817,52.176 v1(59.817,52.451) 59.817,52.716 60.403,53.302 C14.1 ; C25.2 59.436,90.6 v1(59.436,97.663) 59.436,102.313 C15.1 ; C21.1 59.563,85.139 v1(59.563,74.803) 59.563,74.528 60.022,74.069 C18.2 ; C19.2 59.719,108.915 61.548,110.744 v1(61.722,110.744) ; v1(77.724,119.126) 81.485,119.126 C1.1 81.559,119.15 C2.2 85.876,118.872 U3.4 93.169,118.872 94.82,117.221 97.536,117.221 99.109,118.794 C3.1 ; v1(78.486,111.76) 79.723,111.76 79.856,111.627 80.954,111.627 C5.1 81.509,111.276 C6.2 85.749,110.871 U2.4 ; v1(80.899,81.915) 80.899,82.19 81.132,82.423 81.132,84.813 81.585,85.266 C11.1 85.115,85.266 C12.2 ; v1(81.407,73.025) 81.601,73.219 82.363,73.219 C64.2 ; C58.2 85.426,94.972 85.831,95.377 v1(86.106,95.377) 86.235,95.377 88.062,93.55 C59.1 ; C13.2@91.311,106.94 90.858,107.393 91.311,107.846 91.844,107.846 92.075,108.077 v1(93.091,108.077) ; U.3 97.068,89.364 97.174,89.47 97.293,89.47 97.612,89.789 99.358,89.789 ; C62.2 96.52,100.403 95.25,101.673 v1(95.25,103.886) 95.525,103.886 95.906,104.267 C63.1 ; v1(97.028,95.758) 99.314,93.472 99.314,93.136 99.345,93.105 99.345,92.307 U.62 99.358,89.789 ; v1(100.711,109.347) 101.878,110.514 C8.2 ; U.58 101.371,92.281 101.371,90.967 101.514,90.824 101.514,90.043 ; U.54 103.358,90.195 103.206,90.043 101.514,90.043 ; U.51 104.858,89.872 ; U.31@105.371,80.921 105.371,82.13 105.791,82.55 106.426,82.55 v1@108.441,80.535 ; C4.2 107.896,118.642 108.519,118.019 108.519,117.819 111.439,114.899 111.439,114.113 v1(111.633,113.919) ; U.33 108.428,82.864 108.441,82.851 v1@108.441,80.535 ; U.46 106.724,89.364 106.216,89.872 104.858,89.872 ; v1(108.585,80.391) v1@108.441,80.535 ; C61.1 111.76,98.757 v1(111.76,103.124) 112.859,103.124 112.974,103.239 113.804,103.239 C60.2 ; C9.1 113.821,91.899 113.821,90.983 114.274,90.53 115.21,90.53 v1(116.205,89.535) 116.399,89.729 116.847,89.729 117.221,90.103 C10.2 ; C41.2 115.951,73.836 v1(115.951,76.581) ; C40.2 122.501,84.249 124.151,82.599 C39.1 126.039,82.599 126.492,82.146 v1(126.492,79.883) ; C38.2 124.532,111.766 131.418,111.766 131.932,111.252 v1(132.207,111.252) 134.239,109.22 C31.2 ; v1(129.667,85.217) 131.171,83.713 U11.2 132.755,83.166 133.774,83.166 134.747,82.193 U11.5 ; C65.2 137.844,96.569 v1(139.7,98.425) ; C30.2 139.065,63.322 139.518,63.775 143.256,67.513 143.256,71.882 141.605,73.533 141.605,76.962 v1(140.589,77.978) ; C27.1 139.368,99.032 139.7,98.7 v1(139.7,98.425) ; C26.1 139.319,56.642 v1(139.319,51.816) 140.384,50.751 C36.2 ; C33.1 140.589,85.217 v1(140.589,77.978) ; C37.2 140.384,97.672 139.7,98.356 v1(139.7,98.425) ; v1(140.462,35.433) 140.462,38.862 C32.1 ; v1(153.416,40.386) 153.61,40.58 154.048,40.58 155.038,41.57 U9.4 ; v1(153.543,57.023) 153.655,57.135 153.655,59.005 153.746,59.096 U7.4 ; C50.2 159.134,117.197 159.491,116.84 v1(159.766,116.84) 159.788,116.818 160.506,116.818 160.733,117.045 C51.2 ; U10.4 156.054,87.544 146.488,77.978 v1(140.589,77.978) ; U8.4 156.435,104.181 150.679,98.425 v1(139.7,98.425) ; C57.2 164.338,46.179 v1(164.338,48.768) 164.338,51.308 C56.2 ; C53.2 164.592,57.38 v1(164.592,61.087) 164.592,63.676 C52.2 ; C55.2 167.513,91.391 v1(167.513,94.361) 167.513,97.536 C54.2 ; 99.358,89.789 99.358,89.364 100.371,88.351 101.514,88.351 ; 101.514,88.351 105.217,88.351 105.366,88.5 105.366,89.364 104.858,89.872 ; 101.514,88.351 101.514,90.043
  other v1: 108.077,68.58
  other v2: 33.02,33.909 170.053,38.481 32.893,117.475 169.545,119.634
IN0+: P5.1 U1.3 | length 35.7
  Top Layer w0.254: P5.1 35.306,81.153 35.306,106.333 35.455,106.482 U1.3@41.237,106.482
IN0-: P5.2 U1.5 | length 33.7
  Top Layer w0.254: P5.2 36.935,82.064 36.935,99.274 43.493,105.832 U1.5
IN1+: P5.3 U6.3 | length 25.4
  Top Layer w0.254: P5.3 39.612,74.307 41.489,74.307 44.979,77.796 44.979,83.43 41.665,83.43 38.967,86.128 38.967,88.68 39.116,88.829 U6.3
IN1-: P5.4 U6.5 | length 28.5
  Top Layer w0.254: P5.4 42.152,76.569 42.152,82.051 37.719,86.484 37.719,90.932 38.446,91.659 41.437,91.659 42.859,90.237 42.859,88.459 43.139,88.179 U6.5@45.649,88.179
IN2+: P5.5 U4.3 | length 17.6
  Top Layer w0.254: P5.5 39.636,71.743 41.235,71.743 42.152,70.826 42.152,66.713 39.751,64.312 39.751,60.198 40.203,59.746 U4.3
IN2-: P5.6 U4.5 | length 34.7
  Top Layer w0.254: P5.6 42.799,72.898 51.689,64.008 51.689,54.505 51.54,54.356 46.631,54.356 46.482,54.505 46.482,58.744 46.194,59.032 45.369,59.032 U4.5
IN3+: P5.7 U5.3 | length 31.7
  Top Layer w0.254: P5.7 36.703,68.58 36.703,44.704 39.822,41.585 U5.3
IN3-: P5.8 U5.5 | length 36.2
  Top Layer w0.254: P5.8 37.592,66.929 37.592,45.234 37.741,45.085 40.894,45.085 43.053,42.926 43.053,41.954 44.072,40.935 U5.5
IN4+: P6.1 U8.3 | length 43.6
  Top Layer w0.254: U8.3 158.926,104.831 159.131,104.626 159.131,103.886 160.274,102.743 170.815,102.743 171.196,102.362 171.196,86.973 165.625,81.401 165.348,81.401 P6.1
IN4-: P6.2 U8.5 | length 39.4
  Top Layer w0.254: U8.5 163.756,104.181 164.178,103.759 171.323,103.759 172.466,102.616 172.466,85.979 P6.2
IN5+: P6.3 U10.3 | length 17.6
  Top Layer w0.254: U10.3 158.567,88.194 158.75,88.011 158.75,75.714 158.899,75.565 P6.3
IN5-: P6.4 U10.5 | length 15.6
  Top Layer w0.254: U10.5 161.129,82.429 159.893,81.194 159.893,78.225 161.422,76.696 163.461,76.696 P6.4
IN6+: P6.5 U7.3 | length 19.6
  Top Layer w0.254: U7.3 155.318,59.746 156.464,60.892 156.464,72.009 157.48,73.025 P6.5
IN6-: P6.6 U7.5 | length 39.8
  Top Layer w0.254: U7.5 159.323,59.096 159.414,59.005 159.414,54.835 159.766,54.483 166.751,54.483 167.401,55.133 167.401,64.597 164.434,67.564 160.169,67.564 160.02,67.713 160.02,70.358 161.556,71.894 162.52,71.894 163.461,72.835 164.402,72.835 P6.6
IN7+: P6.7 U9.3 | length 40.5
  Top Layer w0.254: U9.3@155.867,42.224 156.72,42.224 158.115,43.62 158.115,52.324 159.893,54.102 166.909,54.102 168.17,55.363 168.17,64.367 P6.7
IN7-: P6.8 U9.5 | length 38.9
  Top Layer w0.254: U9.5 167.427,41.57 169.291,43.434 169.291,65.786 P6.8
NetC13_1: C13.1 U.61 | length 15.9
  Top Layer w0.254: C13.1@90.881,104.443 91.334,103.99 91.334,103.967 95.516,99.785 95.516,99.148 98.679,95.985 98.679,94.996 99.695,93.98 99.695,93.293 99.845,93.143 99.845,92.307 U.61
NetC14_2: C14.2 C16.2 P7.1 R2.2 | length 25.1
  Top Layer w0.254: R2.2 C14.2 57.453,56.972 57.906,57.425 59.155,58.674 60.729,58.674 61.95,57.453 64.973,57.453 65.426,57.906 65.426,57.929 67.46,59.963 67.46,61.477 68.834,62.851 68.834,66.929 P7.1
NetC15_2: C15.2 C17.2 P8.1 R1.2 | length 19.1
  Top Layer w0.254: R1.2 56.31,102.235 56.89,102.815 56.89,103.145 58.188,104.443 59.619,104.443 C17.2 69.674,104.443 P8.1
NetC16_1: C16.1 C18.1 P9.1 R3.2 | length 21.1
  Top Layer w0.254: R3.2 C18.1 57.072,61.392 58.647,59.817 63.727,59.817 64.313,60.403 C16.1 ; C16.1@65.426,60.856 64.973,60.403 C16.1 ; P9.1 64.643,66.167 C16.1
NetC17_1: C17.1 C19.1 P10.1 R4.2 | length 18.8
  Top Layer w0.254: R4.2 52.407,108.712 56.642,108.712 C19.1 56.769,108.278 57.222,107.825 57.529,107.825 58.293,107.061 65.073,107.061 65.708,107.696 P10.1
NetC20_2: C20.2 C22.2 P11.1 R5.2 | length 27
  Top Layer w0.254: R5.2 C20.2 56.261,39.192 56.714,39.645 58.09,41.021 64.473,41.021 64.622,40.872 64.622,40.761 65.075,40.308 70.717,40.308 70.866,40.457 70.866,47.117 P11.1
NetC21_2: C21.2 C23.2 P12.1 R6.2 | length 19.5
  Top Layer w0.254: R6.2 56.564,85.09 C21.2 56.691,85.547 58.061,86.917 64.367,86.917 64.516,86.768 64.516,86.028 C23.2 64.692,85.852 P12.1
NetC22_1: C22.1 C24.1 P13.1 R7.2 | length 19.6
  Top Layer w0.254: R7.2 C24.1 56.437,44.374 56.89,43.921 58.266,42.545 64.473,42.545 64.622,42.694 64.622,42.805 65.075,43.258 C22.1 65.405,45.593 P13.1
NetC23_1: C23.1 C25.1 P14.1 R8.2 | length 20
  Top Layer w0.254: R8.2 C25.1 56.437,90.221 57.271,89.387 60.579,89.387 61.059,89.867 64.367,89.867 64.516,89.718 64.516,88.978 C23.1 68.15,88.851 P14.1
NetC26_2: C26.2 C28.2 P15.1 R9.2 | length 21.3
  Top Layer w0.254: P15.1 133.096,59.005 133.71,58.391 141.104,58.391 142.396,57.099 C26.2 142.523,56.642 R9.2
NetC27_2: C27.2 C29.2 P16.1 R10.2 | length 23.1
  Top Layer w0.254: P16.1 129.667,103.632 129.843,103.808 C29.2 136.98,103.808 138.582,105.41 140.339,105.41 141.842,103.907 141.865,103.907 142.318,103.454 C27.2 142.445,102.997 R10.2
NetC28_1: C28.1 C30.1 P17.1 R11.2 | length 20.4
  Top Layer w0.254: P17.1 135.784,65.172 135.784,61.794 135.331,61.341 C28.1 135.15,61.192 140.545,61.192 142.015,62.662 C30.1 R11.2
NetC29_1: C29.1 C31.1 P18.1 R12.2 | length 22
  Top Layer w0.254: P18.1 127.84,105.869 127.84,106.758 C29.1 140.694,106.758 142.826,108.89 C31.1 142.953,109.093 R12.2
NetC32_2: C32.2 C34.2 P19.1 R13.2 | length 23
  Top Layer w0.254: P19.1 129.491,40.816 C34.2 134.317,41.148 141.71,41.148 143.539,39.319 C32.2 R13.2
NetC33_2: C33.2 C35.2 P20.1 R14.2 | length 20.2
  Top Layer w0.254: P20.1 131.672,89.281 133.02,87.933 C35.2 141.153,87.933 143.285,85.801 C33.2 R14.2
NetC34_1: C34.1 C36.1 P22.1 R15.2 | length 19.6
  Top Layer w0.254: P22.1 131.941,47.002 131.941,45.48 133.655,43.766 C34.1 141.329,43.766 143.334,45.771 C36.1 R15.2
NetC35_1: C35.1 C37.1 P21.1 R16.2 | length 21.1
  Top Layer w0.254: P21.1 131.489,92.285 131.948,92.285 132.59,91.643 132.59,91.336 133.043,90.883 133.68,90.883 134.133,90.43 134.133,90.192 134.282,90.043 141.632,90.043 143.334,91.745 C37.1 143.461,92.202 R16.2
NetC38_1: C38.1 U.52 | length 29
  Top Layer w0.254: U.52 104.371,92.307 104.371,93.291 106.33,95.25 112.649,95.25 116.205,98.806 116.205,99.441 121.793,105.029 121.793,107.313 123.749,109.269 C38.1
NetC41_1: C41.1 U.34 | length 12.7
  Top Layer w0.254: U.34 107.801,83.351 109.435,83.351 109.982,82.804 109.982,82.296 111.76,80.518 111.76,74.979 C41.1
NetC64_1: C64.1 U.5 | length 23
  Top Layer w0.254: C64.1 86.133,77.316 v1(89.21,80.393) ; v1(91.694,90.17) 91.709,90.17 93.475,88.404 U.5@96.03,88.404
  Bottom Layer w0.254: v1(89.21,80.393) 90.619,81.803 91.749,81.803 93.599,83.653 93.599,86.33 91.44,88.489 91.44,89.065 91.529,89.154 91.529,90.005 v1(91.694,90.17)
NetC65_1: C65.1 U.44 | length 35.3
  Top Layer w0.254: U.44 111.224,88.364 112.243,89.383 113.28,89.383 114.017,88.646 114.046,88.646 114.427,88.265 118.723,88.265 118.872,88.414 118.872,90.297 v1(120.142,91.567) ; v1(132.588,97.028) 132.688,97.028 135.179,99.519 C65.1
  Bottom Layer w0.254: v1(120.142,91.567) 128.658,91.567 131.357,94.266 131.357,95.797 v1(132.588,97.028)
NetP1_1: P1.1 U.16 | length 27.2
  Top Layer w0.254: P1.1 80.264,63.881 95.81,79.427 95.81,82.851 95.823,82.864 U.16
NetP1_2: P1.2 U.18 | length 26.1
  Top Layer w0.254: P1.2 84.213,62.738 cw(c85.344,62.738) 85.563,63.848 85.586,63.848 85.692,63.848 98.858,77.014 U.18
NetP1_3: P1.3 U.19 | length 24
  Top Layer w0.254: P1.3 99.358,76.752 U.19
NetP1_4: P1.4 U.17 | length 25.5
  Top Layer w0.254: v1(86.995,68.58) 89.662,68.58 98.358,77.276 U.17
  Bottom Layer w0.254: v1(86.995,68.58) 88.646,66.929 88.646,65.659 87.884,64.897 P1.4
NetP2_1: P2.1 U.55 | length 32.6
  Top Layer w0.254: U.55 102.858,94.222 105.283,96.647 105.283,98.806 115.916,109.439 115.916,109.947 120.015,114.046 120.015,117.094 P2.1
NetP2_2: P2.2 U.56 | length 35.4
  Top Layer w0.254: U.56 102.371,92.307 102.371,93.027 102.371,94.624 104.902,97.155 104.902,99.187 115.443,109.728 115.443,110.744 117.864,113.165 117.864,117.483 P2.2
NetP3_1: P3.1 U.15 | length 46.8
  Top Layer w0.254: P3.1 77.724,49.911 77.724,62.23 79.133,63.639 79.133,63.646 79.356,63.869 79.363,63.869 94.107,78.613 94.107,83.202 94.256,83.351 U.15@96.415,83.351
NetP3_2: P3.2 U.14 | length 44.8
  Top Layer w0.254: P3.2 77.089,51.816 77.089,62.357 93.599,78.867 93.599,81.726 93.726,81.853 93.726,83.377 94.2,83.851 U.14@96.415,83.851
NetP3_3: P3.3 U.13 | length 42.7
  Top Layer w0.254: P3.3 76.708,53.975 76.708,62.515 86.915,72.722 86.915,72.945 93.218,79.248 93.218,81.884 93.345,82.011 93.345,83.535 94.161,84.351 U.13@96.415,84.351
NetP3_4: P3.4 U.12 | length 40.7
  Top Layer w0.254: P3.4 74.676,61.341 90.932,77.597 90.932,80.137 92.964,82.169 92.964,83.693 94.122,84.851 96.415,84.851 U.12
NetR1_1: R1.1 U1.1 U1.2 | length 21.4
  Top Layer w0.254: U1.1 U1.2 41.854,107.132 45.339,110.617 50.778,110.617 50.927,110.468 50.927,106.172 49.53,104.775 49.53,102.572 R1.1
NetR2_1: R2.1 U4.1 U4.2 | length 14
  Top Layer w0.254: U4.2 U4.1 41.808,61.046 41.899,61.137 41.899,62.335 42.048,62.484 45.593,62.484 48.124,59.953 48.124,58.599 49.701,57.022 R2.1
NetR3_1: R3.1 U4.6 U4.7 | length 18.1
  Top Layer w0.254: U4.6 U4.7 45.343,60.358 46.375,60.358 47.117,59.616 47.117,55.626 47.879,54.864 50.778,54.864 50.927,55.013 50.927,57.535 49.828,58.634 R3.1
NetR4_1: R4.1 U1.6 U1.7 | length 6.4
  Top Layer w0.254: U1.7 U1.6 47.47,106.482 49.447,108.459 R4.1
NetR5_1: R5.1 U5.1 U5.2 | length 10.9
  Top Layer w0.254: U5.1 U5.2 40.711,42.198 41.749,42.198 45.085,38.862 R5.1
NetR6_1: R6.1 U6.1 U6.2 | length 11.6
  Top Layer w0.254: U6.1 U6.2 41.839,89.479 42.164,89.154 42.164,87.884 44.22,85.828 48.327,85.828 48.685,85.47 R6.1
NetR7_1: R7.1 U5.6 U5.7 | length 6.3
  Top Layer w0.254: U5.6 U5.7 47.275,42.235 49.364,44.324 R7.1
NetR8_1: R8.1 U6.6 U6.7 | length 6.2
  Top Layer w0.254: U6.6@43.945,88.829 U6.6 ; U6.7 U6.6 ; R8.1 48.558,90.171 47.216,88.829 U6.6
NetR9_1: R9.1 U7.1 U7.2 | length 9
  Top Layer w0.254: R9.1 151.475,56.642 151.475,58.257 153.614,60.396 U7.2 U7.1 U7.1@155.291,61.046
NetR10_1: R10.1 U8.1 U8.2 | length 9.4
  Top Layer w0.254: R10.1 153.924,102.997 156.408,105.481 U8.2 U8.1
NetR11_1: R11.1 U7.6 U7.7 | length 23.4
  Top Layer w0.254: R11.1 149.645,62.612 147.828,60.795 147.828,55.013 147.977,54.864 153.834,54.864 156.591,57.621 156.591,59.436 156.901,59.746 U7.6 U7.7
NetR12_1: R12.1 U8.6 U8.7 | length 14.6
  Top Layer w0.254: R12.1 149.308,108.713 149.666,108.355 157.583,108.355 160.419,105.519 161.473,105.519 U8.7 U8.6
NetR13_1: R13.1 U9.1 U9.2 | length 8
  Top Layer w0.254: R13.1 150.324,39.369 153.825,42.87 U9.2 U9.1
NetR14_1: R14.1 U10.1 U10.2 | length 9
  Top Layer w0.254: R14.1 150.451,85.851 154.094,89.494 U10.1 U10.2
NetR15_1: R15.1 U9.6 U9.7 | length 23.6
  Top Layer w0.254: R15.1 150.197,45.721 148.928,44.452 148.928,37.106 149.077,36.957 153.289,36.957 158.552,42.22 U9.6 U9.7
NetR16_1: R16.1 U10.6 U10.7 | length 13.1
  Top Layer w0.254: R16.1 150.324,91.822 150.682,91.464 157.456,91.464 160.038,88.882 161.092,88.882 U10.7 U10.6
NetSW1_2: SW1.2 U.30 | length 28.5
  Top Layer w0.254: U.30 104.858,79.292 108.502,75.648 v1(108.668,75.648)
  Bottom Layer w0.254: v1(108.668,75.648) 108.668,70.91 SW1.2
NetU11_3: U11.3 U.32 | length 33.6
  Top Layer w0.254: U.32 105.858,80.294 105.871,80.281 105.906,80.281 107.82,78.367 108.817,78.367 109.206,77.978 v1(109.474,77.978) ; v1(128.143,82.931) 128.337,82.737 129.079,82.737 131.582,80.234 131.659,80.234 132.207,79.686 U11.3
  Bottom Layer w0.254: v1(109.474,77.978) 109.601,77.978 113.157,81.534 113.157,82.423 114.935,84.201 127.889,84.201 128.143,83.947 v1(128.143,82.931)
NetU_57: U.57 W1.2 | length 27.5
  Top Layer w0.254: U.57 101.858,94.777 104.267,97.186 104.267,99.401 110.236,105.37 110.236,108.585 114.935,113.284 W1.2
START: P4.14 U.37 | length 74.5
  Top Layer w0.254: P4.14 97.917,45.72 112.014,45.72 113.474,47.18 113.474,63.182 117.6,67.308 118.235,67.308 v1(122.555,71.628) ; U.37 114.526,84.864 115.713,83.677 115.713,82.788 v1(116.967,81.534)
  Bottom Layer w0.254: v1(116.967,81.534) 122.712,75.789 122.712,71.785 v1(122.555,71.628)
SYNC_IN: P4.12 U.36 | length 67.9
  Top Layer w0.254: P4.12 96.012,48.895 98.552,46.355 111.633,46.355 112.661,47.383 112.661,64.274 v1(120.523,72.136) ; U.36@107.814,84.364 112.74,84.364 113.804,83.3 113.804,82.538 114.935,81.407 v1(115.189,81.407)
  Bottom Layer w0.254: v1(115.189,81.407) 120.523,76.073 v1(120.523,72.136)
SYNC_OUT: P4.6 U.38 | length 59.6
  Top Layer w0.254: P4.6 106.807,46.99 111.379,46.99 111.878,47.489 111.878,64.274 118.872,71.268 118.872,81.955 115.463,85.364 U.38
V3ref: C3.2 C4.1 SW1.3 U3.6 U11.1 U11.4 U.11 U.35 W1.1 | length 168.6
  Top Layer w0.254: v1(91.948,83.439) 91.948,84.455 92.857,85.364 U.11 ; U3.6 100.938,120.142 102.087,121.291 102.798,121.291 C3.2 103.349,121.646 107.496,121.646 C4.1@107.692,121.646 ; v1(101.981,97.409) 101.981,100.965 102.003,100.987 102.003,101.197 99.441,103.759 99.441,107.166 99.292,107.315 96.774,107.315 94.996,109.093 94.996,115.443 96.012,116.459 98.552,116.459 99.187,117.094 104.775,117.094 105.791,118.11 105.791,119.937 C4.1@107.496,121.642 ; C4.1 107.896,121.642 110.031,119.507 W1.1 ; U.35 110.192,83.864 v1(111.125,82.931) ; v1(133.096,76.962) 134.64,76.962 136.662,78.983 136.739,78.983 137.287,79.531 U11.4 U11.1 137.287,85.196 136.779,85.704 v1(136.779,85.979)
  Bottom Layer w0.254: v1(91.948,83.439) 90.17,85.217 90.17,90.932 97.663,98.425 100.965,98.425 v1(101.981,97.409) 101.981,97.247 102.708,96.52 105.283,96.52 111.125,90.678 v1(111.125,82.931) 114.427,86.233 136.25,86.233 136.504,85.979 v1(136.779,85.979) ; SW1.3 120.523,64.262 127.254,70.993 127.254,71.056 133.096,76.898 v1(133.096,76.962)
V4ref: C7.2 C8.1 C11.2 C12.1 C39.2 C40.1 U2.6 U.6 U.43 | length 100.2
  Top Layer w0.254: C11.2 85.065,88.216 C12.1 88.035,88.368 v1(88.9,87.503) 89.916,88.519 92.731,88.519 93.386,87.864 U.6 ; U2.6 101.954,112.141 103.429,113.616 C7.2 107.594,113.616 C8.1 107.896,113.514 108.519,112.891 109.003,112.407 109.728,111.682 109.728,106.934 103.251,100.457 v1(103.251,100.33) ; U.43 110.357,87.864 110.377,87.884 112.101,87.884 112.584,88.367 v1(112.859,88.367) 113.134,88.367 113.629,87.872 121.678,87.872 C40.1 122.501,87.249 123.124,86.626 123.124,86.509 123.273,86.36 123.39,86.36 124.201,85.549 C39.2
  Bottom Layer w0.254: v1(88.9,87.503) 89.154,87.503 89.789,88.138 89.789,91.567 98.552,100.33 v1(103.251,100.33) 112.859,90.722 v1(112.859,88.367)
VCM: P4.8 U.59 | length 61.1
  Top Layer w0.254: v1(91.567,62.23) 91.567,62.081 92.075,61.573 92.075,51.943 92.559,51.459 99.798,51.459 P4.8 ; U.59 100.869,92.305 100.869,93.213 101.219,93.563 v1(101.219,95.631)
  Bottom Layer w0.254: v1(91.567,62.23) 91.567,66.802 101.219,76.454 v1(101.219,95.631)
pads on no net: P4.10 U2.1 U2.3 U2.5 U2.7 U2.8 U3.1 U3.3 U3.5 U3.7 U3.8
copper on no net: | length 481.2
  Top Layer w0.254: 27.305,117.729 27.305,34.036 ccw(c31.941,33.718) 31.623,29.083 168.529,29.083 ccw(c167.767,37.592) 176.276,38.354 176.276,120.142 ccw(c169.736,119.951) 169.545,126.492 33.909,126.492 ccw(c34.861,118.936) 27.34,117.735

## Polygon pours and split planes (outlines as drawn)
GND on Bottom Layer "GND" (solid, pour order 7): 34.671,124.206 35.179,124.714 169.545,124.714 174.879,119.38 174.879,38.354 167.132,30.607 166.878,30.861 32.004,30.861 29.21,33.655 29.21,117.653
5V on Top Layer "5V" (solid, pour order 6): 34.671,124.206 35.179,124.714 169.545,124.714 174.752,119.507 174.752,38.227 167.132,30.607 166.878,30.861 31.75,30.861 29.337,33.274 29.337,117.805

## Silkscreen, mask and mechanical layers (free items; w line width, h text height)
Top Overlay:
  text "4-7" at 166.624,74.422 h1.52
  text "0-3" at 31.496,73.406 h1.52
  text "CLK" at 88.519,65.151 h1.52
  text "CS" at 75.692,61.976 h1.52
  text "SDI" at 79.502,59.182 h1.52
  text "SDO" at 84.074,59.182 h1.52
  text "reset" at 117.602,48.133 h1.52
  text "DOUT7-1" at 85.852,44.323 h1.52

## Dimensions
176.31,37.592 to 27.051,34.417 on Top Layer
169.545,126.492 to 168.529,29.083 on Top Layer

## Text inside footprints (layer, text, board x,y; h text height)
P4: Top Overlay "2" at 115.697,49.784 h1.27 r180; Top Overlay "1" at 115.062,52.578 h1.27 r180; Top Overlay "15" at 88.9,53.213 h1.27 r180; Top Overlay "16" at 88.9,50.673 h1.27 r180
P5: Top Overlay "8" at 43.434,68.961 h1.27 r270; Top Overlay "7" at 35.56,68.707 h1.27 r270; Top Overlay "1" at 35.179,78.232 h1.27 r270; Top Overlay "2" at 40.132,80.772 h1.27 r270
P6: Top Overlay "8" at 165.989,68.707 h1.27 r270; Top Overlay "7" at 156.464,68.961 h1.27 r270; Top Overlay "1" at 157.226,79.375 h1.27 r270; Top Overlay "2" at 167.005,80.264 h1.27 r270